# EAGLE board E-Piano-SM (EAGLE 9.4.0)
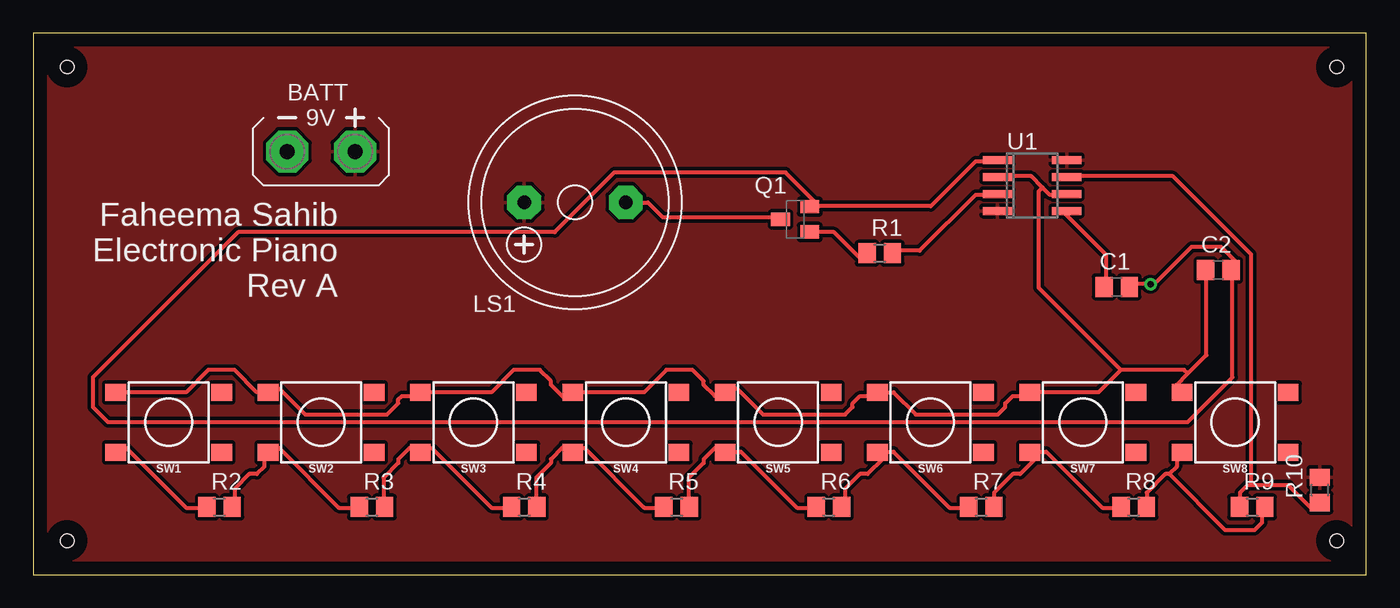
[diagram p0: board, top side]
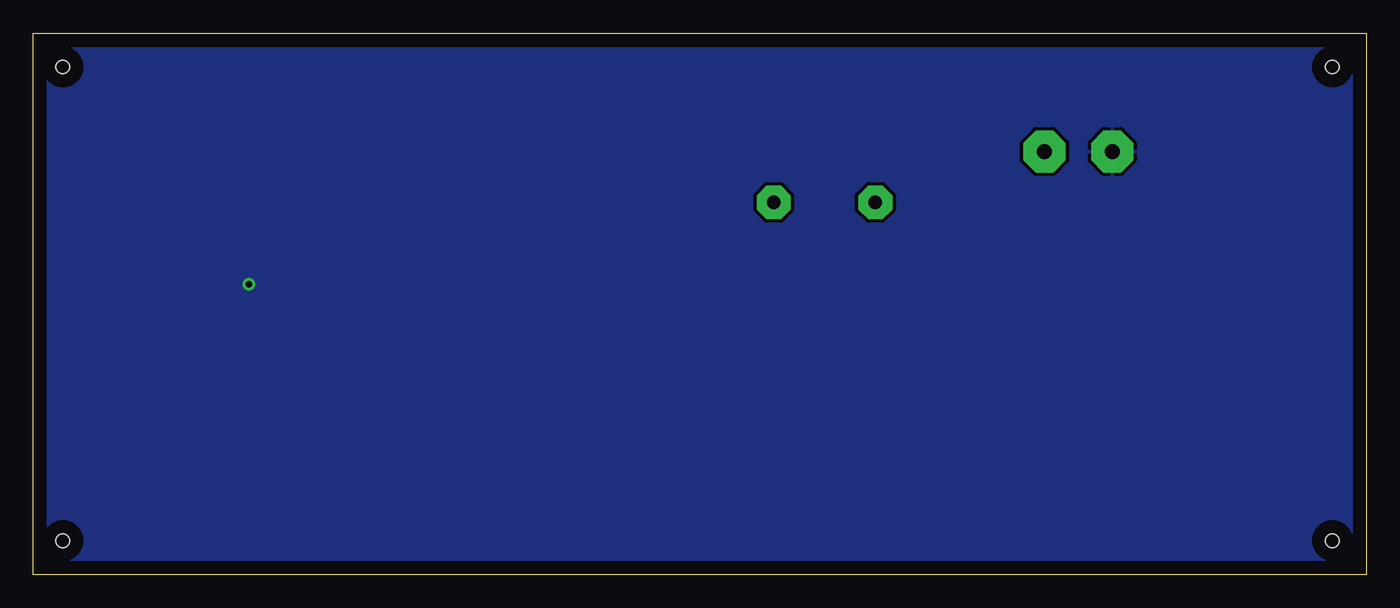
[diagram p1: board, bottom side, seen from below]

Size 100 x 40.63 mm. Coordinates in mm from the lower left corner, seen from the top.
Outline: 0,0 100,0 100,40.63 0,40.63 0,0
Copper layers (1*16): Top 0.035mm / dielectric 1.5mm / Bottom 0.035mm
Design rules "default": minimum track width 6mil, minimum drill 0.35mm, track to track 6mil, track to pad 6mil, pad to pad 6mil, via to via 6mil, smd to smd 6mil, copper to edge 40mil, drill to drill 6mil, minimum pad ring 10mil, minimum via ring 8mil, stop-mask expansion 4mil, vias tented up to drill 0mil, thermal gap 10mil
Net classes: 0 default: width 0.305 mm, drill 0.508 mm, clearance 0.254 mm
Holes 1 mm at 2.54,38.1 2.54,2.54 97.79,2.54 97.79,38.1

## Footprints (pad centres in the part's own frame; a part is rotated, then mirrored left to right if it is on the bottom)
AB9V = drill 1.118 pad 3.15 octagon: + 0,2.54; - 0,-2.54
C0805 = smd 1.3 x 1.5: 1 -0.95,0; 2 0.95,0
F/HMB = drill 1.016 pad 2.54 octagon: + 3.81,0; - -3.81,0
SOT23-BEC = smd 1 x 1.4: B -0.95,-1.1; C 0,1.1; E 0.95,-1.1
R0805 = smd 1.3 x 1.5: 1 -0.95,0; 2 0.95,0
TACTILE_SWITCH_SMD_6.2MM_TALL = smd 1.55 x 1.3: A1 -3.975,-2.25; A2 3.975,-2.25; B1 -3.975,2.25; B2 3.975,2.25
SO08 = smd 0.6 x 2.2: 1 -1.905,-2.6; 2 -0.635,-2.6; 3 0.635,-2.6; 4 1.905,-2.6; 5 1.905,2.6; 6 0.635,2.6; 7 -0.635,2.6; 8 -1.905,2.6

## Placement (x,y rotation side)
BATT  AB9V  [AB9V]  21.59,31.75 270 top
C1  0.1uF  [C0805]  81.28,21.59 0 top
C2  0.1uF  [C0805]  88.9,22.86 0 top
LS1  [F/HMB]  40.64,27.94 180 top
Q1  BCW66  [SOT23-BEC]  57.15,26.67 90 top
R1  1K  [R0805]  63.5,24.13 0 top
R2  1.5K  [R0805]  13.97,5.08 0 top
R3  1.3K  [R0805]  25.4,5.08 0 top
R4  620  [R0805]  36.83,5.08 0 top
R5  1.1K  [R0805]  48.26,5.08 0 top
R6  1K  [R0805]  59.69,5.08 0 top
R7  910  [R0805]  71.12,5.08 0 top
R8  390  [R0805]  82.55,5.08 0 top
R9  6.2K  [R0805]  91.44,5.08 0 top
R10  1K  [R0805]  96.52,6.35 90 top
SW1  MOMENTARY-SWITCH-SPST-SMD-6.2MM-TALL  [TACTILE_SWITCH_SMD_6.2MM_TALL]  10.16,11.43 180 top
SW2  MOMENTARY-SWITCH-SPST-SMD-6.2MM-TALL  [TACTILE_SWITCH_SMD_6.2MM_TALL]  21.59,11.43 180 top
SW3  MOMENTARY-SWITCH-SPST-SMD-6.2MM-TALL  [TACTILE_SWITCH_SMD_6.2MM_TALL]  33.02,11.43 180 top
SW4  MOMENTARY-SWITCH-SPST-SMD-6.2MM-TALL  [TACTILE_SWITCH_SMD_6.2MM_TALL]  44.45,11.43 180 top
SW5  MOMENTARY-SWITCH-SPST-SMD-6.2MM-TALL  [TACTILE_SWITCH_SMD_6.2MM_TALL]  55.88,11.43 180 top
SW6  MOMENTARY-SWITCH-SPST-SMD-6.2MM-TALL  [TACTILE_SWITCH_SMD_6.2MM_TALL]  67.31,11.43 180 top
SW7  MOMENTARY-SWITCH-SPST-SMD-6.2MM-TALL  [TACTILE_SWITCH_SMD_6.2MM_TALL]  78.74,11.43 180 top
SW8  MOMENTARY-SWITCH-SPST-SMD-6.2MM-TALL  [TACTILE_SWITCH_SMD_6.2MM_TALL]  90.17,11.43 180 top
U1  NE555D  [SO08]  74.93,29.21 270 top

## Library data of the parts
BATT = battery
C1 C2 = rcl; MOUSER#: 791-MT21B104K500CT; MPN: MT21B104K500CT; OC_NEWARK: unknown; SPICEPREFIX: C
LS1 = buzzer; MOUSER#: 665-AST-01508MR-R; OC_FARNELL: unknown; OC_NEWARK: unknown
Q1 = transistor; MF: INFINION TECHNOLOGIES; MOUSER#: 726-BCW66KHE6327HTSA; MPN: BCW66KHE6327HTSA1; OC_NEWARK: 58K2048
R1 R6 R10 = rcl; MOUSER#: 652-CR0805FX-1001ELF; MPN: CR0805FX-1001ELF; OC_NEWARK: unknown; SPICEPREFIX: R
R2 = rcl; MOUSER#: 652-CR0805FX-1501ELF; MPN: CR0805FX-1501ELF; OC_NEWARK: unknown; SPICEPREFIX: R
R3 = rcl; MOUSER#: 652-CR0805JW-132ELF; MPN: CR0805JW-132ELF; OC_NEWARK: unknown; SPICEPREFIX: R
R4 = rcl; MOUSER#: 652-CR0805JW-621ELF; MPN: CR0805JW-621ELF; OC_NEWARK: unknown; SPICEPREFIX: R
R5 = rcl; MOUSER#: 652-CR0805FX-1101ELF; MPN: CR0805FX-1101ELF; OC_NEWARK: unknown; SPICEPREFIX: R
R7 = rcl; MOUSER#: 652-CR0805FX-9100ELF; MPN: CR0805FX-9100ELF; OC_NEWARK: unknown; SPICEPREFIX: R
R8 = rcl; MOUSER#: 652-CR0805JW-391ELF; MPN: CR0805JW-391ELF; OC_NEWARK: unknown; SPICEPREFIX: R
R9 = rcl; MOUSER#: 652-CR0805FX-6201ELF; MPN: CR0805FX-6201ELF; OC_NEWARK: unknown; SPICEPREFIX: R
SW1-SW8 = SparkFun-Switches; MOUSER#: 653-B3F-1000; OC_NEWARK: unknown; PROD_ID: SWCH-11966; SF_SKU: COM-12992
U1 = linear; MOUSER#: 595-TLC555CDR; MPN: TLC555CDR; OC_NEWARK: 24M8296

## Nets
0: BATT.- C1.2 C2.2 Q1.E U1.1
N$1: R8.2 R9.2 SW8.B2
N$2: R9.1 R10.1 U1.7
N$3: R2.1 SW1.B2
N$4: R7.2 R8.1 SW7.B2
N$5: R6.2 R7.1 SW6.B2
N$6: R5.2 R6.1 SW5.B2
N$7: R4.2 R5.1 SW4.B2
N$8: R3.2 R4.1 SW3.B2
N$9: R2.2 R3.1 SW2.B2
N$11: R1.2 U1.3
N$12: C1.1 U1.5
N$13: LS1.- Q1.C
N$14: Q1.B R1.1
TR: C2.1 SW1.A2 SW2.A2 SW3.A2 SW4.A2 SW5.A2 SW6.A2 SW7.A2 SW8.A2 U1.2 U1.6
VCC: BATT.+ LS1.+ R10.2 U1.4 U1.8

## Tracks (layer width: path | path; a pad name or v marks a point on that pad's centre or on a via)
0  (via drill 0.51)
  Top 0.305: C1.2 82.42,21.79 v83.82,21.79 84.1,21.79 86.89,24.59 89.13,24.59 90.25,23.47 90.25,23.19 89.97,22.91 C2.2 89.97,22.63 89.97,14.81 86.61,11.46 5.59,11.46 4.47,12.57 4.47,14.81 15.37,25.7 39.12,25.7 43.59,30.18 56.44,30.18 58.95,27.66 | 58.95,27.66 67.33,27.66 70.69,31.01 72.08,31.01 U1.1 | 58.95,27.66 58.4,27.66 Q1.E
  pour Bottom: -1.27,44.45 -1.27,-1.27 101.6,-1.27 101.6,44.45
N$1
  Top 0.305: 85.22,7.54 84.94,7.54 83.54,6.15 83.54,5.31 R8.2 | 85.22,7.54 85.78,8.1 85.78,8.94 86.06,9.22 SW8.B2 | 85.22,7.54 89.41,3.35 91.64,3.35 92.2,3.91 92.2,5.03 R9.2
N$2
  Top 0.305: 91.36,6.71 94.16,6.71 95.83,5.03 96.11,5.03 96.39,5.31 R10.1 | 91.36,6.71 91.08,6.71 90.53,6.15 90.53,5.31 R9.1 | 91.36,6.71 91.36,24.03 85.5,29.9 77.67,29.9 U1.7
N$3
  Top 0.305: R2.1 12.85,5.03 11.46,5.03 6.99,9.5 6.71,9.5 6.43,9.22 SW1.B2
N$4
  Top 0.305: 74.88,9.22 75.16,8.94 75.16,8.66 74.04,7.54 73.48,7.54 72.08,6.15 72.08,5.31 R7.2 | 74.88,9.22 76,9.22 80.19,5.03 81.58,5.03 R8.1 | 74.88,9.22 SW7.B2
N$5
  Top 0.305: 63.42,9.22 63.7,8.94 63.7,8.66 62.59,7.54 62.03,7.54 60.91,6.43 60.91,5.31 R6.2 | 63.42,9.22 64.54,9.22 68.73,5.03 70.13,5.03 R7.1 | 63.42,9.22 SW6.B2
N$6
  Top 0.305: R5.2 49.17,5.31 49.17,7.26 50.29,8.38 50.29,8.66 51.13,9.5 51.41,9.5 51.69,9.22 SW5.B2 51.97,9.22 53.09,9.22 57.28,5.03 58.67,5.03 R6.1
N$7
  Top 0.305: R4.2 37.72,5.31 37.72,7.26 38.84,8.38 38.84,8.66 39.67,9.5 39.95,9.5 40.23,9.22 SW4.B2 40.51,9.22 40.79,9.5 41.35,9.5 45.82,5.03 47.22,5.03 R5.1
N$8
  Top 0.305: R3.2 26.26,5.31 26.26,7.26 27.38,8.38 27.38,8.66 28.22,9.5 28.5,9.5 28.78,9.22 SW3.B2 29.06,9.22 29.34,9.5 29.9,9.5 34.37,5.03 35.76,5.03 R4.1
N$9
  Top 0.305: R2.2 15.09,5.31 15.09,6.43 16.2,7.54 16.76,7.54 17.32,8.1 17.32,8.94 17.6,9.22 SW2.B2 17.88,9.22 18.16,9.5 18.44,9.5 22.91,5.03 24.31,5.03 R3.1
N$11
  Top 0.305: R1.2 64.54,24.31 66.5,24.31 70.69,28.5 72.08,28.5 U1.3
N$12
  Top 0.305: C1.1 80.47,21.79 80.47,24.03 77.39,27.1 U1.5
N$13
  Top 0.305: LS1.- 46.1,27.94 47.22,26.82 55.88,26.82 Q1.C
N$14
  Top 0.305: Q1.B 58.4,25.7 60.07,25.7 62.03,23.75 62.31,23.75 62.59,24.03 R1.1
TR
  Top 0.305: 75.72,29.06 76.28,28.5 77.39,28.5 U1.6 | 75.72,29.06 74.88,29.9 72.36,29.9 U1.2 | 86.61,15.09 85.78,14.25 85.78,13.97 86.06,13.69 SW8.A2 | 86.61,15.09 88.01,16.48 88.01,22.63 C2.1 | 81.58,15.37 79.91,13.69 74.88,13.69 SW7.A2 74.6,13.41 73.48,13.41 72.92,12.85 72.92,12.57 72.36,12.01 66.22,12.01 64.54,13.69 63.42,13.69 SW6.A2 63.14,13.41 62.03,13.41 61.47,12.85 61.47,12.57 60.91,12.01 54.76,12.01 52.81,13.97 52.25,13.97 51.97,13.69 SW5.A2 51.69,13.41 51.13,13.41 50.29,14.25 50.29,14.53 49.45,15.37 47.5,15.37 45.82,13.69 40.51,13.69 SW4.A2 40.23,13.41 39.67,13.41 38.84,14.25 38.84,14.53 38,15.37 36.04,15.37 34.37,13.69 29.06,13.69 SW3.A2 28.78,13.41 27.66,13.41 27.38,13.13 27.38,12.85 26.54,12.01 20.4,12.01 18.44,13.97 18.16,13.97 17.88,13.69 SW2.A2 17.6,13.69 16.76,13.69 15.09,15.37 13.13,15.37 11.46,13.69 6.43,13.69 SW1.A2 | 81.58,15.37 86.33,15.37 86.61,15.09 | 75.72,29.06 75.44,28.78 75.44,21.51 81.58,15.37
VCC
  pour Top: -1.27,45.72 -1.27,-1.27 101.6,-1.27 101.6,45.72

## Text on the board
tNames: Faheema Sahib / Electronic Piano / Rev A